# Altium PCB PVLoad.PcbDoc
Units mil, origin at the board's own origin, x right, y up, seen from the top; angles counter-clockwise.
Board outline 3405.51 x 3877.95 mil, 2 copper layers (Top Layer, Bottom Layer), stack 65.792 mil thick; 28 components, 20 nets, 107 pads, 1040 vias.
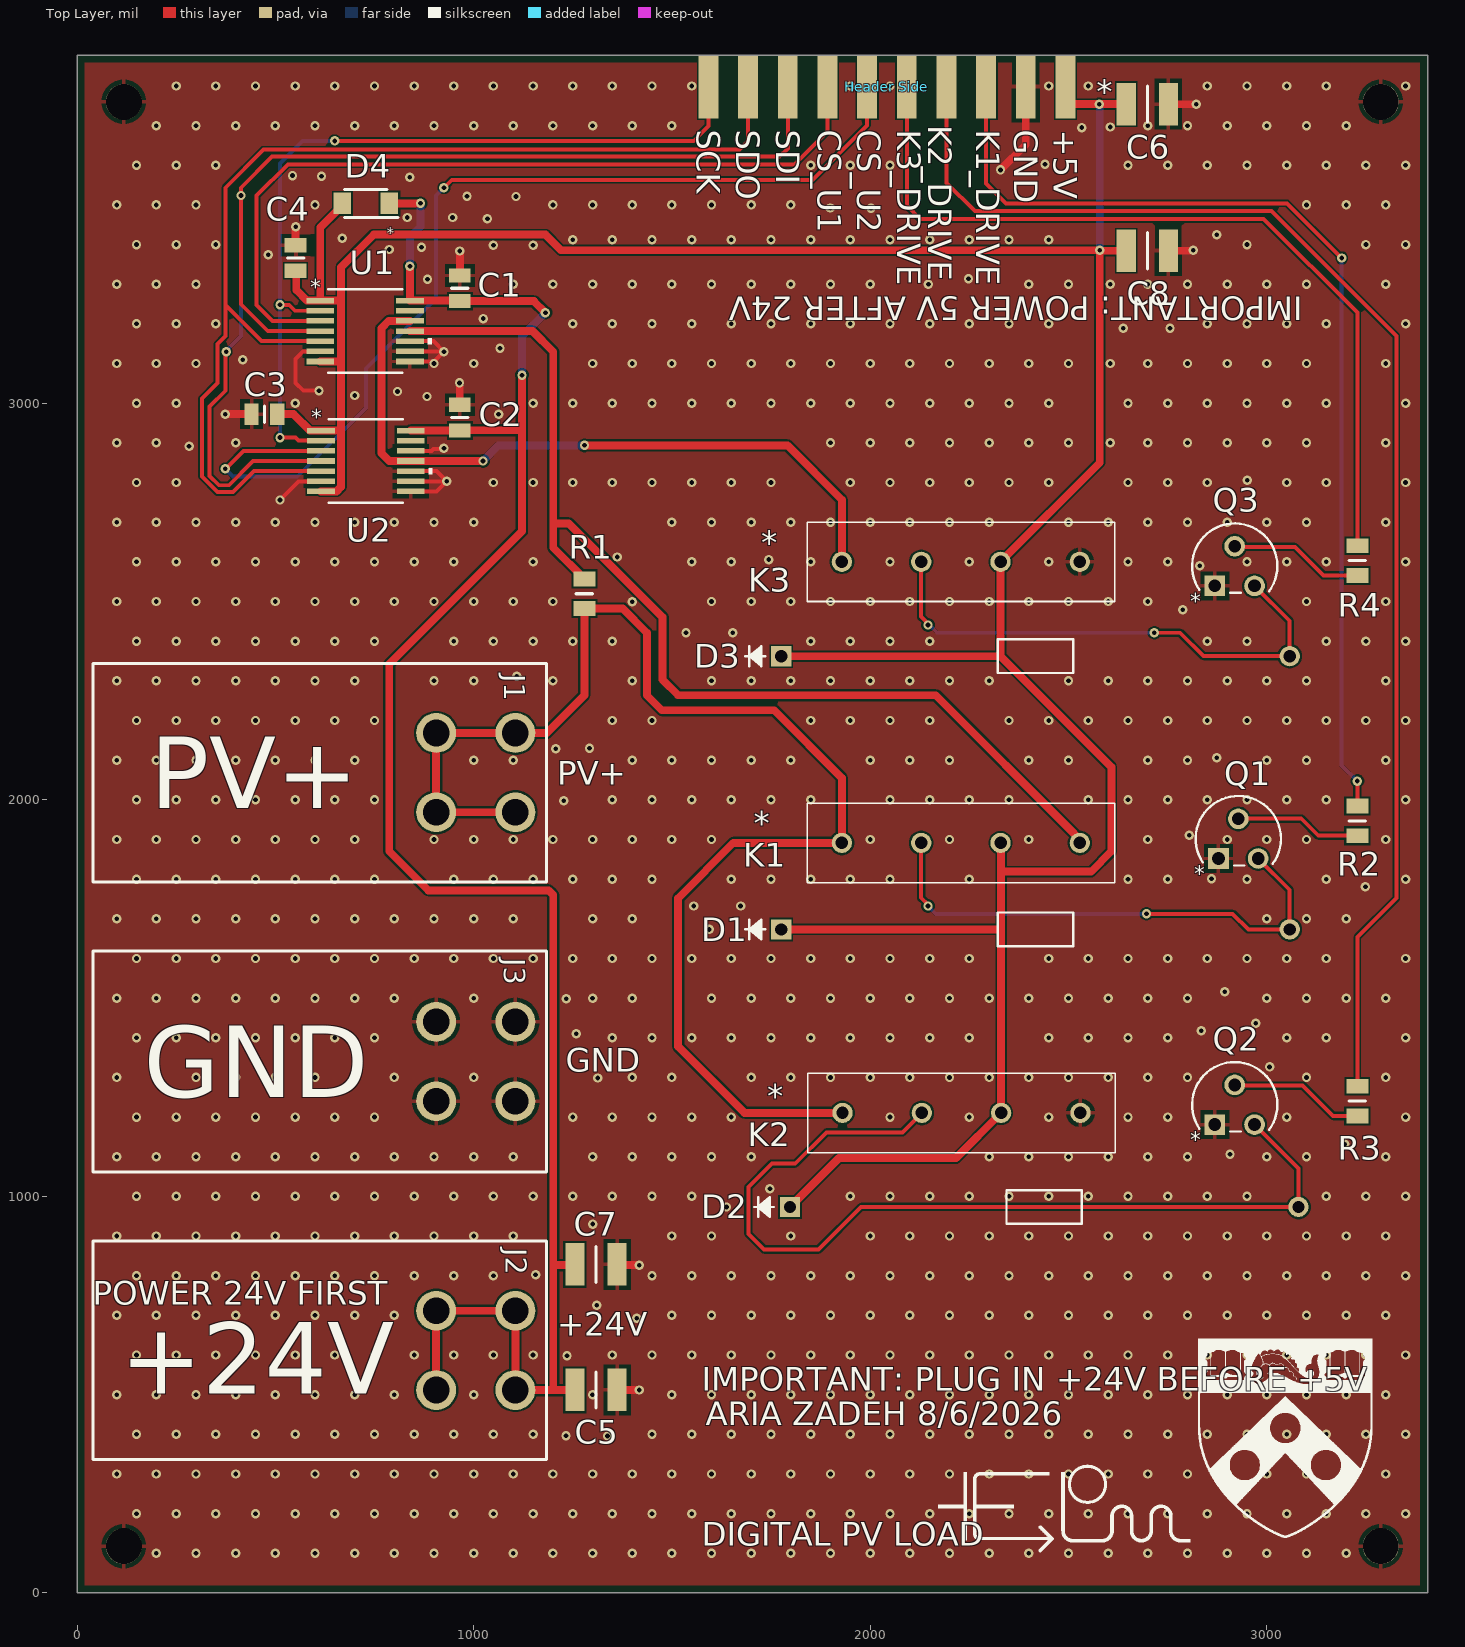
[diagram p0: Top Layer view]
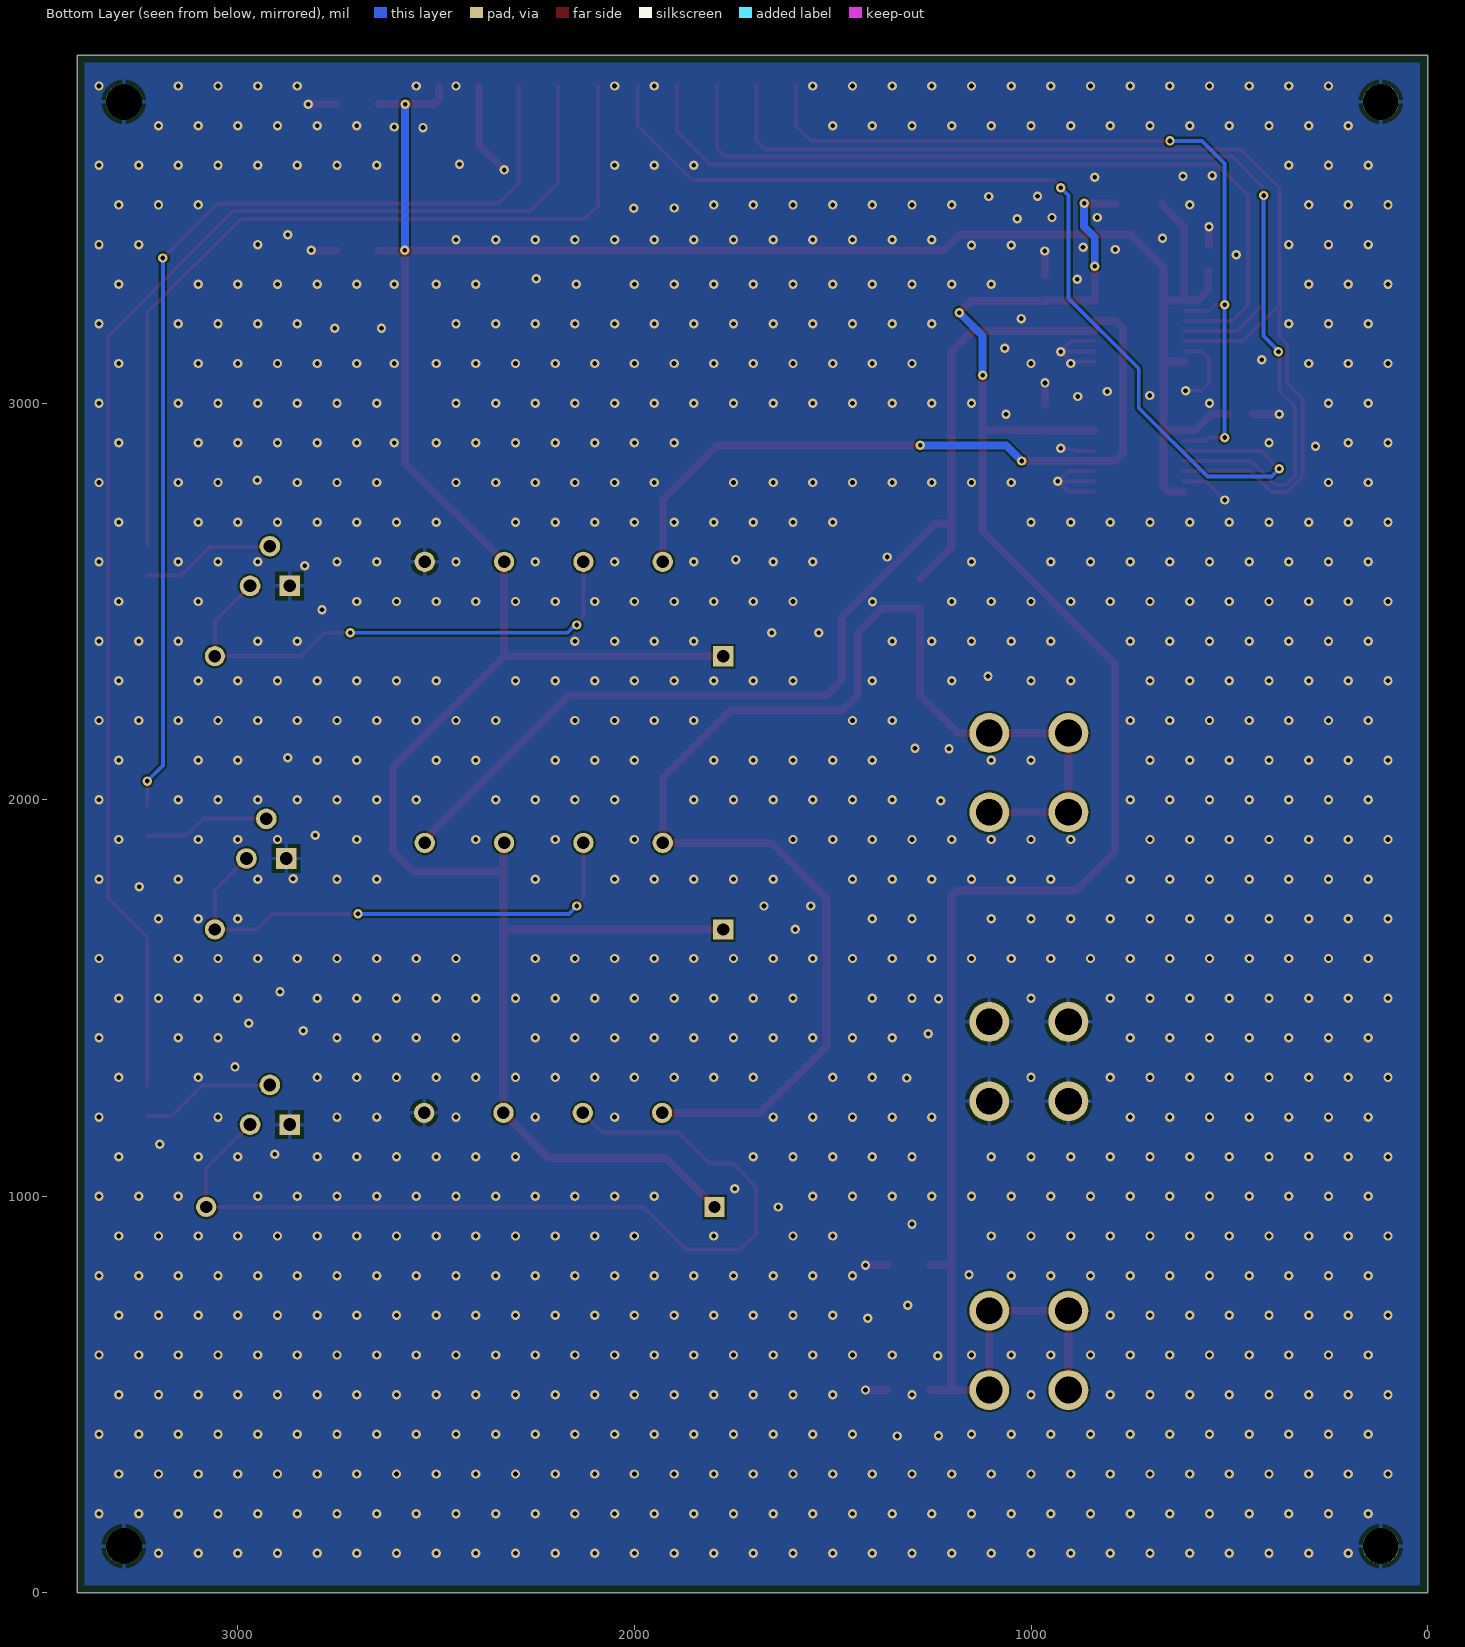
[diagram p1: Bottom Layer view, seen from below]
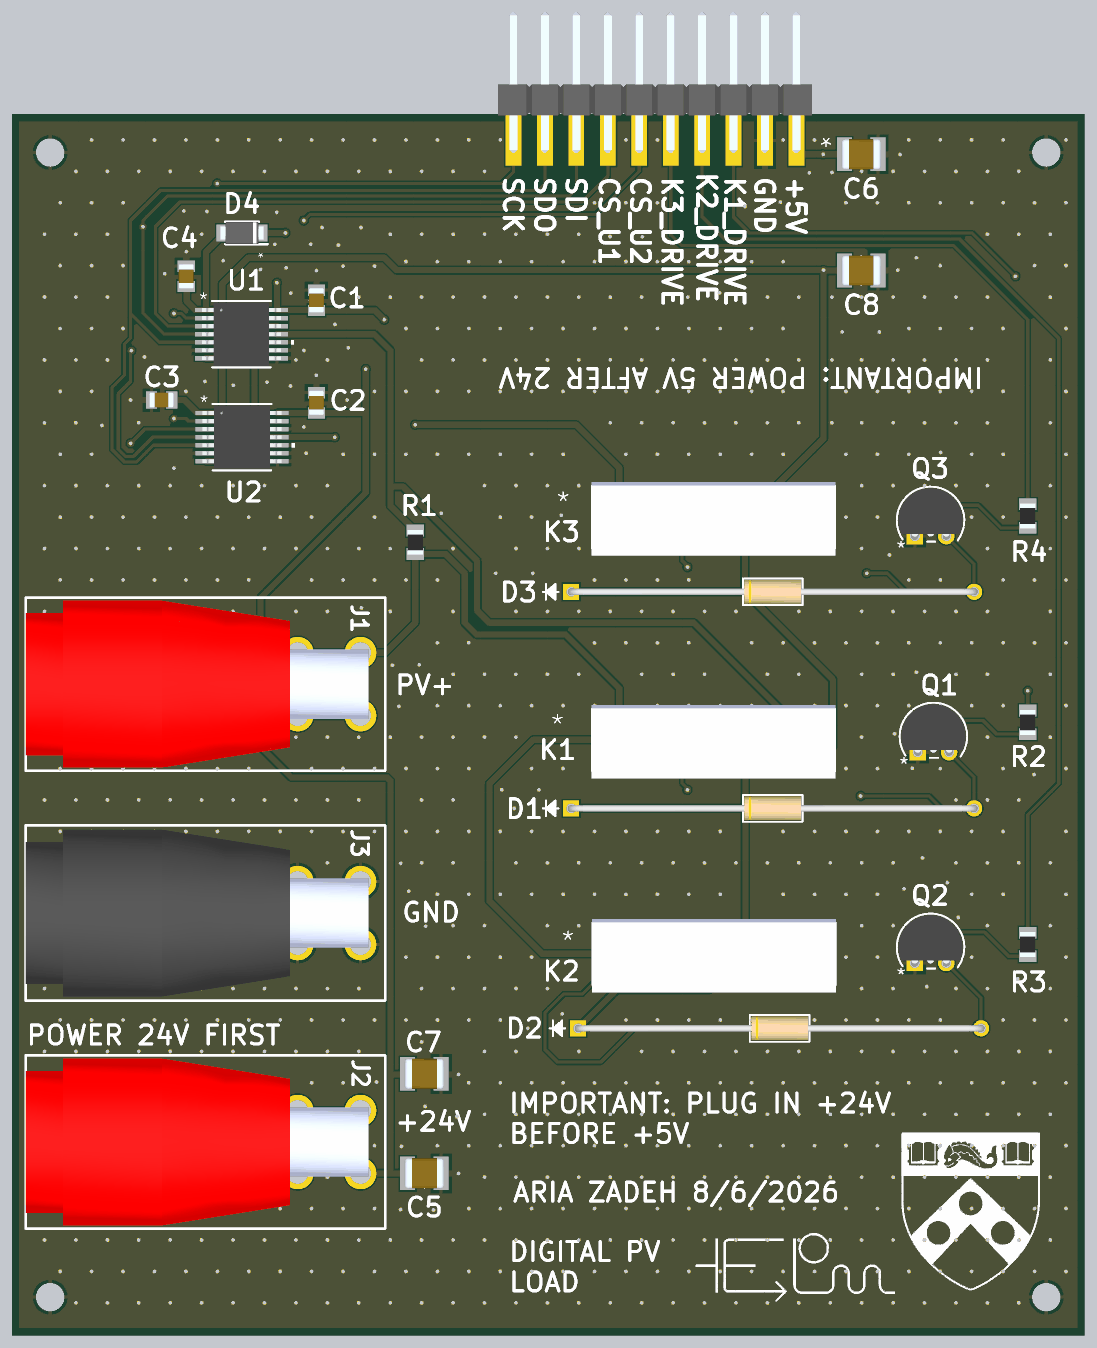
[diagram p2: 3D render of the assembled board from above, using the file's embedded part models]

## Layer stack, top to bottom
Top Solder: solder mask 0.4, Solder Resist, Dk 3.5
Top Layer: signal copper 1.4
Dielectric 1: dielectric 62.9921, FR-4, Dk 4.8
Bottom Layer: signal copper 1.4
Bottom Solder: solder mask 0.4, Solder Resist, Dk 3.5

## Board outline
0,0 3405.51,0 3405.51,3877.95 0,3877.95

## Design rules (kind name [scope] priority, off if disabled: settings)
BoardOutlineClearance [All] p1: gap=0 ignorepadtopadclearanceinfootprint=FALSE
Clearance [All] p1: gap=5 ignorepadtopadclearanceinfootprint=TRUE except(0: Arc-Text Arc-Hole Track-Text Track-Hole SMDPad-Text SMDPad-Hole THPad-Text THPad-Hole Via-Text Via-Hole Fill-Text Fill-Hole Poly-Text Poly-Hole Region-Text Region-Hole Text-Text Text-Hole)
HoleSize [All] p1: absolutevalues=TRUE maxlimit=100 minlimit=10 maxpercent=80.000 minpercent=20.000
MinimumAnnularRing [All] p1: minimumring=0
PolygonConnect [All] p1: thpad.connectstyle=Relief thpad.reliefconductorwidth=10 thpad.reliefentries=4 thpad.polygonreliefangle="90 Angle" thpad.airgapwidth=10 smdpad.connectstyle=Relief smdpad.reliefconductorwidth=10 smdpad.reliefentries=4 smdpad.polygonreliefangle="90 Angle" smdpad.airgapwidth=10 via.connectstyle=Direct via.reliefconductorwidth=10 via.reliefentries=4 via.polygonreliefangle="90 Angle" via.airgapwidth=10
RoutingVias [All] p1: holewidth=28 width=50 viastyle="Through Hole" minholewidth=10 minwidth=20 maxholewidth=100 maxwidth=200
SilkToSilkClearance [All] p1: silktosilkclearance=0
SilkToSolderMaskClearance [IsPad] p1: minsilkscreentomaskgap=0 clearancetoexposedcopper=TRUE
SolderMaskExpansion [All] p1: expansion=0 istentingtop=FALSE
SupplyNets "Schematic Supply Nets_3" [InNet('+5V')] p1: voltage=0.000
SupplyNets "Schematic Supply Nets_2" [InNet('+24V')] p2: voltage=0.000
SupplyNets "Schematic Supply Nets_1" [InNet('GND')] p3: voltage=0.000
SupplyNets "Schematic Supply Nets" [InNet('PV+')] p4: voltage=0.000
Width Width_Analog [All] p1: maxlimit=78.74 minlimit=10 preferedwidth=19.68 minimp=50.000000 maximp=50.000000 favimp=50.000000
Width Width_PowerRails [InNet('+24V') or InNet('+5V') or InNet('GND')] p2: maxlimit=78.74 minlimit=15.75 preferedwidth=19.68
Width [All] p3: maxlimit=78.74 minlimit=7.87 preferedwidth=9.84
27 further rules are at their usual default settings.

## Components (designator, comment, footprint, x,y, rotation, side; value= is the part's Value field where it differs from the comment)
C1 "0.1uF Capacitor" "CAPC2012X95N 0.1UF" 965.37,3289.8 r90 top
C2 "0.1uF Capacitor" "CAPC2012X95N 0.1UF" 965.35,2963.64 r90 top
C3 "0.1uF Capacitor" "CAPC2012X95N 0.1UF" 472.44,2972.44 r180 top
C4 "0.1uF Capacitor" "CAPC2012X95N 0.1UF" 551.18,3366.14 r90 top
C5 "10uF Capacitor" "CAPC3225X270N 10UF" 1308.68,512.03 r0 top
C6 "10uF Capacitor" "CAPC3225X270N 10UF" 2698.83,3754.37 r180 top
C7 "10uF Capacitor" "CAPC3225X270N 10UF" 1308.68,828.7 r0 top
C8 "10uF Capacitor" "CAPC3225X270N 10UF" 2698.83,3384.45 r180 top
D1 "1N4148" AXIAL_017AG_T26_ONS 1775.87,1673.23 r0 top
D2 "1N4148" AXIAL_017AG_T26_ONS 1797.82,973.41 r0 top
D3 "1N4148" AXIAL_017AG_T26_ONS 1775.87,2362.2 r0 top
D4 "1N5819HW1-7-F" SODFL3518X115N 728.35,3503.94 r180 top
"Header Side" "Sideways Header x10" "SIDEWAYS HEADER X10" 2492.3,3798.03 r180 top
J1 "CT3151-2" CALTEST_CT3151-2 1105.51,2168.5 r270 top
J2 "CT3151-2" CALTEST_CT3151-2 1105.51,711.81 r270 top
J3 "CT3151-0" CT31510 1105.51,1440.16 r270 top
K1 "HE3621A0540" HE3621A0540 1928.61,1891.35 r0 top
K2 "HE3621A0540" HE3621A0540 1930.2,1210.53 r0 top
K3 "HE3621A0540" HE3621A0540 1928.61,2600.01 r0 top
Q1 "2N3904BU" TO-92_FAS 2878.22,1851.98 r0 top
Q2 "2N3904BU" TO-92_FAS 2869.16,1181.12 r0 top
Q3 "2N3904BU" TO-92_FAS 2869.16,2539.39 r0 top
R1 "RC0805FR-07470KL" "RESC2012X60N 470K" 1279.53,2519.68 r90 top
R2 "RC0805FR-071KL" "RESC2012X60N 1K" 3228.35,1946.85 r270 top
R3 "RC0805FR-071KL" "RESC2012X60N 1K" 3228.35,1240.16 r270 top
R4 "RC0805FR-071KL" "RESC2012X60N 1K" 3228.35,2603.22 r270 top
U1 "MCP41HV51-502E/ST" TSSOP14_MC_MCH-M 726.44,3181.98 r0 top
U2 "MCP41HV51-502E/ST" TSSOP14_MC_MCH-M 728.35,2854.33 r0 top

## Footprints (in the part's own frame and the unit in brackets; to place one, negate y for a bottom-side part, rotate by r counter-clockwise, add the part's x,y. Pads: shape width x height; smd on the part's side, far side on the other; paste and mask are expansions set on the pad)
AXIAL_017AG_T26_ONS [mil]
  rect 51x51 hole 31 paste-99999 mask+0: 1(0,0)
  round 51 hole 31 paste-99999 mask+0: 2(1282,0)
  silkscreen extent -90,-42 736,42, body extent -11,-37 1292,37, height 75
CALTEST_CT3151-2 [mm]
  round 2.55 hole 1.7: 1(0,0) 2(5.08,0) 3(0,-5.08) 4(5.08,-5.08)
  silkscreen extent -4.46,-27.05 9.54,1.98, body extent -4.21,-27.06 9.29,0.64, height 19.44
"CAPC2012X95N 0.1UF" [mm]
  rect 0.91x1.39 smd: 1(-0.82,0) 2(0.82,0)
  silkscreen extent 0,-0.53 0,0.53, body extent -1,-0.63 1,0.63, height 0.95
"CAPC3225X270N 10UF" [mm]
  rect 1.22x2.72 smd: 1(-1.35,0) 2(1.35,0)
  silkscreen extent 0,-1.15 0,1.15, body extent -1.6,-1.25 1.6,1.25, height 2.7
CT31510 [mm]
  round 2.55 hole 1.7: 1(0,0) 2(0,-5.08) 3(5.08,-5.08) 4(5.08,0)
  silkscreen extent -4.54,-27.06 9.61,1.98, body extent -4.21,-27.06 9.29,0.64, height 19.53
HE3621A0540 [mm]
  round 1.3 hole 0.8: 1(0,0) 2(5.08,0) 3(10.16,0) 4(15.24,0)
  silkscreen extent -2.23,-2.54 17.47,2.54, body extent -2.23,-3.13 17.47,2.96, height 8.49
"RESC2012X60N 1K" [mm]
  rect 0.95x1.4 smd: 1(-0.95,0) 2(0.95,0)
  silkscreen extent 0,-0.53 0,0.53, body extent -1,-0.63 1,0.63, height 0.6
"RESC2012X60N 470K" [mm]
  rect 0.95x1.4 smd: 1(-0.95,0) 2(0.95,0)
  silkscreen extent 0,-0.53 0,0.53, body extent -1,-0.63 1,0.63, height 0.6
"SIDEWAYS HEADER X10" [mil]
  rect 50x160 smd paste-99999 mask+0: 1(0,0) 2(100,0) 3(200,0) 4(300,0) 5(400,0) 6(500,0) 7(600,0) 8(700,0) 9(800,0) 10(900,0)
  body extent -50,-408 950,40, height 50
SODFL3518X115N [mm]
  rect 1.12x1.37 smd: 1(-1.5,0) 2(1.5,0)
  silkscreen extent -2.06,-0.9 1.35,0.9, body extent -1.75,-0.9 1.75,0.9, height 1.15
TO-92_FAS [mil]
  rect 52x52 hole 32 paste-99999 mask+0: 1(0,0)
  round 52 hole 32 paste-99999 mask+0: 2(50,100) 3(100,0)
  silkscreen extent -57,-18 158,157, body extent -52,-11 152,152, height 297
TSSOP14_MC_MCH-M [mil]
  rect 70x14 smd paste+0 mask+0: 1(-113,76.77) 2(-113,51.18) 3(-113,25.59) 4(-113,0) 5(-113,-25.59) 6(-113,-51.18) 7(-113,-76.77) 8(113,-76.77) 9(113,-51.18) 10(113,-25.59) 11(113,0) 12(113,25.59) 13(113,51.18) 14(113,76.77)
  silkscreen extent -94,-105 168,106, body extent -126,-101 126,101, height 47

## Part data
C1 C2 C3 C4: "Capacitor", Arrow Part Number=CL21B104KBCNNNC, Manufacturer_Name=SAMSUNG, Mouser Part Number=187-CL21B104KBCNNNC, Arrow Price/Stock=https://www.arrow.com/en/products/cl21b104kbcnnnc/samsung-electro-mechanics?utm_currency=USD&region=nac, Datasheet Link=https://datasheet.datasheetarchive.com/originals/distributors/Datasheets_SAMA/86a3eaf0882763ef32124d5901f9b833.pdf, Height=0.95mm, Manufacturer_Part_Number=CL21B104KBCNNNC, Mouser Price/Stock=https://www.mouser.co.uk/ProductDetail/Samsung-Electro-Mechanics/CL21B104KBCNNNC?qs=349EhDEZ59pEfpnm5yBEmQ%3D%3D
C5 C6 C7 C8: "Capacitor", Arrow Part Number=CL32B106KBJNNNE, Manufacturer_Name=SAMSUNG, Mouser Part Number=187-CL32B106KBJNNNE, Arrow Price/Stock=https://www.arrow.com/en/products/cl32b106kbjnnne/samsung-electro-mechanics.html?utm_currency=USD&region=nac, Datasheet Link=https://datasheet.datasheetarchive.com/originals/distributors/Datasheets-DGA10/2406903.pdf, Height=2.7mm, Manufacturer_Part_Number=CL32B106KBJNNNE, Mouser Price/Stock=https://www.mouser.co.uk/ProductDetail/Samsung-Electro-Mechanics/CL32B106KBJNNNE?qs=349EhDEZ59rXK%2FOM74I5cg%3D%3D
D1 D2 D3: "No Description Available", Manufacturer_Name=onsemi, Copyright="Copyright (C) 2026 Ultra Librarian. All rights reserved.", Manufacturer_Part_Number=1N4148
D4: "Schottky Diode", Manufacturer_Name="Diodes Incorporated", Mouser Part Number=621-1N5819HW1-7-F, Arrow Part Number=1N5819HW1-7-F, Arrow Price/Stock=https://www.arrow.com/en/products/1n5819hw1-7-f/diodes-incorporated?utm_currency=USD&region=nac, Datasheet Link=https://www.diodes.com//assets/Datasheets/1N5819HW1.pdf, Height=1.15mm, Manufacturer_Part_Number=1N5819HW1-7-F, Mouser Price/Stock=https://www.mouser.co.uk/ProductDetail/Diodes-Incorporated/1N5819HW1-7-F?qs=60RJRzIpcl9ACQG7Zn63jQ%3D%3D
J1 J2: "Banana Jack Connector Standard Banana Solder Red", Package=None, Check_prices=https://www.snapeda.com/parts/CT3151-2/Cal+Test+Electronics/view-part/?ref=eda, MF="Cal Test", MP=CT3151-2, SnapEDA_Link=https://www.snapeda.com/parts/CT3151-2/Cal+Test+Electronics/view-part/?ref=snap
J3: "4mm Safety Jack Horizontal PCB Mount", Manufacturer_Name="Cal Test", Mouser Part Number=510-CT3151-0, Datasheet Link=https://componentsearchengine.com/Datasheets/1/CT3151-0.pdf, Geometry.Height=13.5mm, Manufacturer_Part_Number=CT3151-0, Mouser Price/Stock=https://www.mouser.co.uk/ProductDetail/Cal-Test/CT3151-0?qs=vgjKjNJexTi7zzqDU3Xrcg%3D%3D
K1 K2 K3: "Reed Relay 5VDC 500Ohm 0.5A SPST-NO(20.2x6.05x7.87)mm THT Dry", Manufacturer_Name=LITTELFUSE, Mouser Part Number=934-HE3621A0540, Arrow Part Number=HE3621A0540, Arrow Price/Stock=https://www.arrow.com/en/products/he3621a0540/littelfuse?utm_currency=USD&region=nac, Datasheet Link=https://m.littelfuse.com/~/media/electronics/datasheets/reed_relays/littelfuse_reed_relays_he3600_datasheet.pdf.pdf, Geometry.Height=7.87mm, Manufacturer_Part_Number=HE3621A0540, Mouser Price/Stock=https://www.mouser.co.uk/ProductDetail/Littelfuse/HE3621A0540?qs=X8LBAgEWIKIUBLwFF6DU2A%3D%3D
Q1 Q2 Q3: "No Description Available", Manufacturer_Name="onsemi / Fairchild Semiconductor", Copyright="Copyright (C) 2026 Ultra Librarian. All rights reserved.", Manufacturer_Part_Number=2N3904BU, RefDes=RefDes, Type=Type
R1: "Resistor", Manufacturer_Name="Yageo Group", Mouser Part Number=603-RC0805FR-07470KL, Arrow Part Number=RC0805FR-07470KL, Arrow Price/Stock=https://www.arrow.com/en/products/rc0805fr-07470kl/yageo.html?utm_currency=USD&region=nac, Datasheet Link=http://www.yageo.com/documents/recent/PYu-RC_Group_51_RoHS_L_10.pdf, Height=0.6mm, Manufacturer_Part_Number=RC0805FR-07470KL, Mouser Price/Stock=https://www.mouser.com/Search/ProductDetail.aspx?qs=SufOd%252bAGZfh3Zo2uEHI0rQ%3d%3d
R2 R3 R4: "Resistor", Manufacturer_Name=TDK, Datasheet Link=https://www.yageo.com/upload/media/product/productsearch/datasheet/rchip/PYu-RC_Group_51_RoHS_L_11.pdf, Height=0.6mm, Manufacturer_Part_Number=RC0805FR-071KL
U1 U2: library part MCP41HV51-502EST, "No Description Available", Manufacturer_Name=Microchip, Copyright="Copyright (C) 2026 Ultra Librarian. All rights reserved.", Manufacturer_Part_Number=MCP41HV51-502E/ST, RefDes=RefDes, Type=Type

## Free pads (board coordinates)
  round 90.55 hole 90.55 unplated: 0(118.11,3759.84) 1(3287.4,3759.84) 2(118.11,118.11) 3(3287.4,118.11)

## Via types
v1: diameter 23.62, hole 11.81, Top Layer to Bottom Layer, tented both sides, 1040 vias

## Nets (pads, with @x,y where several pads share a name; then routed paths per layer and width w, separated by ;. In a path a pad name is that pad's centre, name@x,y a point inside that pad or via, vN(x,y) a via of type N, cw(c..) or ccw(c..) an arc to the next point about the centre after c; other vN are vias at no path point)
+5V: "Header Side.1" C3.1 C4.1 C6.2 C8.2 D1.1 D2.1 D3.1 D4.2 K1.3 K2.3 K3.3 U1.1 U1.7 U2.1 U2.7 | length 8324.4
  Top Layer w19.68: C3.1 546.01,2972.44 587.35,2931.1 U2.1 665.85,2931.1 ; C4.1 552.87,3332.16 552.87,3285.71 579.83,3258.75 U1.1 ; U1.7 665.85,3105.2 ; U2.7 654.32,2777.56 665.85,2789.09 665.85,2931.1 ; D4.2 669.29,3499.02 613.44,3443.16 U1.1 ; D1.1 2330.2,1673.23 ; D3.1 2328.61,2362.2 ; D2.1 1921.19,1096.79 2216.46,1096.79 K2.3 2330.2,1673.23 ; K1.3 2330.2,1889.76 2330.2,1818.88 ; 2492.3,3798.03 2492.3,3767.13 2507.45,3751.98 2507.45,3754.14 v1(2577.5,3754.14) 2645.44,3754.14 C6.2 ; v1(2578.74,3385.83) 2578.74,3384.54 2578.74,2850.14 K3.3 2328.61,2362.2 ; v1@2578.74,3385.9 1220.4,3385.9 1181.1,3425.2 748.03,3425.2 665.85,3343.02 665.85,3258.75 ; v1@2580.03,3384.54 2580.56,3385.07 2581.18,3384.45 C8.2 ; U1.1 665.85,3258.75 ; 665.85,2931.1 665.85,3105.2 ; 665.85,3105.2 665.85,3258.75 ; 2328.61,2362.2 2608.25,2082.56 2608.25,1870.09 2557.05,1818.88 2330.2,1818.88 ; 2330.2,1673.23 2330.2,1818.88
  Bottom Layer w19.68: v1(2578.74,3385.83) 2578.74,3751.83 2578.26,3752.32 2578.26,3752.42 v1@2578.74,3752.9
+24V: C1.1 C2.1 C5.1 C7.1 D4.1 J2.1 J2.2 J2.3 J2.4 U1.14 U2.14 | length 4998.6
  Top Layer w19.68: D4.1 v1(866.14,3503.94) ; U1.14@839.42,3261.59 v1(839.42,3345.39) ; U1.14 C1.1@964.14,3258.75 ; U2.14@841.35,2931.36 C2.1 ; J2.4 J2.3 J2.1 J2.2 1200.79,511.81 ; C1.1 1151.94,3257.51 v1(1181.1,3228.35) ; C2.1@965.61,2931.61 1122.05,2931.61 ; v1(1122.05,3070.87) 1122.05,2931.61 ; C5.1@1255.53,511.81 1200.79,511.81 ; C7.1@1255.53,826.77 1201.22,826.77 1200.79,826.34 ; 1122.05,2931.61 1122.05,2677.17 787.4,2342.52 787.4,1870.08 885.83,1771.65 1189.26,1771.65 1195.02,1765.89 1200.79,1760.12 1200.79,826.34 ; 1200.79,511.81 1200.79,826.34
  Bottom Layer w19.68: v1(839.42,3345.39) 839.42,3418.16 866.14,3444.88 v1(866.14,3503.94) ; v1(1122.05,3070.87) 1122.05,3169.29 v1(1181.1,3228.35)
CHAIN: K3.1 U1.12 U2.11 | length 1793
  Top Layer w19.68: U1.12 786.31,3207.57 767.72,3188.98 767.72,2874.02 787.4,2854.33 v1(1023.62,2854.33) ; v1(1279.53,2893.7) 1791.34,2893.7 1928.61,2756.43 K3.1
  Bottom Layer w19.68: v1(1023.62,2854.33) 1062.99,2893.7 v1(1279.53,2893.7)
CS_U1: "Header Side.7" U1.3 | length 2072.4
  Top Layer w10: U1.3 493.22,3207.57 452.76,3248.03 452.76,3523.62 531.5,3602.36 1809.5,3602.36 1892.3,3685.16 1892.3,3798.03
CS_U2: "Header Side.6" U2.3 | length 2560.7
  Top Layer w10: v1(374.02,2834.65) 419.29,2879.92 U2.3 ; v1(925.2,3543.31) 944.88,3562.99 1854.5,3562.99 1992.3,3700.79 1992.3,3798.03
  Bottom Layer w10: v1(374.02,2834.65) 393.7,2814.96 555.3,2814.96 728.35,2988 728.35,3087.07 905.51,3264.23 905.51,3523.62 v1(925.2,3543.31)
GND: "Header Side.2" C1.2 C2.2 C3.2 C4.2 C5.2 C6.1 C7.2 C8.1 J3.1 J3.2 J3.3 J3.4 K2.4 K3.4 pad.0 pad.1 pad.2 pad.3 Q1.1 Q2.1 Q3.1 U1.6 U1.8 U1.9 U1.10 U2.6 U2.8 U2.9 U2.10 U2.12 | length 1690.2
  Top Layer w10: v1(511.81,2755.91) 559.06,2803.15 U2.6 ; v1(610.24,3031.5) 570.87,3031.5 551.18,3051.18 551.18,3111.78 570.2,3130.8 U1.6 ; U1.8 900.48,3105.2 v1(925.2,3129.92) v1@924.76,3130.36 ; U1.9 839.87,3130.36 v1@924.76,3130.36 ; U1.10 898.73,3156.39 v1@924.76,3130.36 ; U2.8 906.41,2777.56 v1@932.01,2803.15 ; U2.9 v1@932.01,2803.15 ; U2.10 906.02,2828.74 v1@931.41,2803.35 ; U2.12 893.39,2879.92 898.39,2884.92 923.39,2884.92 v1(925.2,2886.73) ; v1(932.2,2803.35) v1@932.01,2803.15
  Top Layer w19.68: v1(374.02,2972.44) C3.2 ; C4.2 v1(551.18,3444.88) ; v1(964.57,3051.18) 964.96,3050.79 964.96,2996.32 C2.2 ; C1.2 v1(965.37,3383.96) ; C5.2@1361.82,511.81 v1(1417.32,511.81) ; C7.2@1361.82,826.77 v1(1417.32,826.77) ; v1(2328.44,3588.28) 2392.3,3652.14 2392.3,3798.03 ; C8.1 2812.52,3384.45 2813.9,3385.83 v1(2814.96,3385.83) ; C6.1 2752.58,3753.76 v1(2822.35,3753.76)
  other v1: 200,100 300,100 400,100 500,100 600,100 700,100 800,100 900,100 1000,100 1100,100 1200,100 1300,100 1400,100 1500,100 1600,100 1700,100 1800,100 1900,100 2000,100 2100,100 2200,100 2300,100 2400,100 2500,100 2600,100 2700,100 2800,100 2900,100 3000,100 3100,100 3200,100 150,200 250,200 350,200 450,200 550,200 650,200 750,200 850,200 950,200 1050,200 1150,200 1250,200 1350,200 1450,200 1550,200 1650,200 1750,200 1850,200 1950,200 2050,200 2150,200 2250,200 2350,200 2450,200 2550,200 2650,200 2750,200 2850,200 2950,200 3050,200 3150,200 3250,200 3350,200 100,300 200,300 300,300 400,300 500,300 600,300 700,300 800,300 900,300 1000,300 1100,300 1200,300 1300,300 1400,300 1500,300 1600,300 1700,300 1800,300 1900,300 2000,300 2100,300 2200,300 2300,300 2400,300 2500,300 2600,300 2700,300 2800,300 2900,300 3000,300 3100,300 3200,300 3300,300 1337.56,395.74 1233.15,396.74 150,400 250,400 350,400 450,400 550,400 650,400 750,400 850,400 950,400 1050,400 1150,400 1450,400 1550,400 1650,400 1750,400 1850,400 1950,400 2050,400 2150,400 2250,400 2350,400 2450,400 2550,400 2650,400 2750,400 2850,400 2950,400 3050,400 3150,400 3250,400 3350,400 100,500 200,500 300,500 400,500 500,500 600,500 700,500 800,500 1000,500 1300,500 1500,500 1600,500 1700,500 1800,500 1900,500 2000,500 2100,500 2200,500 2300,500 2400,500 2500,500 2600,500 2700,500 2800,500 2900,500 3000,500 3100,500 3200,500 3300,500 1235.49,597.89 150,600 250,600 350,600 450,600 550,600 650,600 750,600 850,600 950,600 1050,600 1150,600 1350,600 1450,600 1550,600 1650,600 1750,600 1850,600 1950,600 2050,600 2150,600 2250,600 2350,600 2450,600 2550,600 2650,600 2750,600 2850,600 2950,600 3050,600 3150,600 3250,600 3350,600 1411.62,692.59 100,700 200,700 300,700 400,700 500,700 600,700 700,700 800,700 1500,700 1600,700 1700,700 1800,700 1900,700 2000,700 2100,700 2200,700 2300,700 2400,700 2500,700 2600,700 2700,700 2800,700 2900,700 3000,700 3100,700 3200,700 3300,700 1310.81,725.4 150,800 250,800 350,800 450,800 550,800 650,800 750,800 850,800 950,800 1050,800 1450,800 1550,800 1650,800 1750,800 1850,800 1950,800 2050,800 2150,800 2250,800 2350,800 2450,800 2550,800 2650,800 2750,800 2850,800 2950,800 3050,800 3150,800 3250,800 3350,800 1156.26,802.44 100,900 200,900 300,900 400,900 500,900 600,900 700,900 800,900 900,900 1000,900 1100,900 1500,900 1600,900 1800,900 2000,900 2100,900 2200,900 2300,900 2400,900 2500,900 2600,900 2700,900 2800,900 2900,900 3000,900 3100,900 3200,900 3300,900 1300.05,930.21 1637.72,973.44 150,1000 250,1000 350,1000 450,1000 550,1000 650,1000 750,1000 850,1000 950,1000 1050,1000 1150,1000 1250,1000 1350,1000 1450,1000 1550,1000 1950,1000 2050,1000 2150,1000 2250,1000 2350,1000 2450,1000 2550,1000 2650,1000 2750,1000 2850,1000 2950,1000 3150,1000 3250,1000 3350,1000 1747.15,1019.13 100,1100 200,1100 300,1100 400,1100 500,1100 600,1100 700,1100 800,1100 900,1100 1000,1100 1100,1100 1300,1100 1400,1100 1500,1100 1600,1100 1700,1100 2300,1100 2400,1100 2500,1100 2600,1100 2700,1100 2800,1100 3000,1100 3100,1100 3300,1100 2907.14,1106.02 3196.6,1131.13 150,1200 250,1200 350,1200 450,1200 550,1200 650,1200 750,1200 1250,1200 1350,1200 1450,1200 1550,1200 1650,1200 2050,1200 2250,1200 2450,1200 2650,1200 2750,1200 3050,1200 3350,1200 1312.95,1298.44 100,1300 200,1300 300,1300 400,1300 500,1300 600,1300 700,1300 800,1300 1000,1300 1400,1300 1500,1300 1700,1300 1800,1300 1900,1300 2000,1300 2100,1300 2200,1300 2300,1300 2400,1300 2500,1300 2600,1300 2700,1300 2800,1300 3100,1300 3300,1300 3007.04,1326.49 150,1400 250,1400 350,1400 450,1400 550,1400 650,1400 750,1400 1350,1400 1450,1400 1550,1400 1650,1400 1750,1400 1850,1400 1950,1400 2050,1400 2150,1400 2250,1400 2450,1400 2550,1400 2650,1400 2750,1400 3050,1400 3150,1400 3350,1400 1259.17,1409.96 2834.65,1417.32 2972.44,1437.01 1233.33,1498.58 100,1500 200,1500 300,1500 400,1500 500,1500 600,1500 700,1500 800,1500 1000,1500 1300,1500 1400,1500 1600,1500 1700,1500 1800,1500 1900,1500 2000,1500 2100,1500 2200,1500 2300,1500 2400,1500 2500,1500 2600,1500 2700,1500 2800,1500 3000,1500 3100,1500 3200,1500 3300,1500 2893.7,1515.75 150,1600 250,1600 350,1600 450,1600 550,1600 650,1600 750,1600 850,1600 950,1600 1050,1600 1150,1600 1250,1600 1350,1600 1450,1600 1550,1600 1650,1600 1750,1600 1850,1600 1950,1600 2050,1600 2150,1600 2250,1600 2450,1600 2550,1600 2650,1600 2750,1600 2850,1600 2950,1600 3050,1600 3150,1600 3350,1600 1594.49,1673.23 100,1700 200,1700 300,1700 400,1700 500,1700 600,1700 700,1700 800,1700 900,1700 1000,1700 1100,1700 1300,1700 1400,1700 3000,1700 3100,1700 3200,1700 1555.12,1732.28 1673.23,1732.28 3248.71,1780.96 150,1800 250,1800 350,1800 450,1800 550,1800 650,1800 750,1800 950,1800 1050,1800 1150,1800 1250,1800 1350,1800 1450,1800 1650,1800 1750,1800 1850,1800 1950,1800 2050,1800 2250,1800 2650,1800 2750,1800 2950,1800 3150,1800 3350,1800 2860.67,1801.22 100,1900 200,1900 300,1900 400,1900 500,1900 600,1900 700,1900 900,1900 1000,1900 1100,1900 1200,1900 1300,1900 1400,1900 1500,1900 1600,1900 2000,1900 2200,1900 2400,1900 2700,1900 2900,1900 3000,1900 3100,1900 3300,1900 2804.83,1910.46 1227.61,1998.01 150,2000 250,2000 350,2000 450,2000 550,2000 650,2000 750,2000 1350,2000 1450,2000 1550,2000 1650,2000 1750,2000 1850,2000 2050,2000 2150,2000 2250,2000 2350,2000 2550,2000 2650,2000 2750,2000 2850,2000 2950,2000 3050,2000 3150,2000 3350,2000 100,2100 200,2100 300,2100 400,2100 500,2100 600,2100 700,2100 1000,2100 1100,2100 1400,2100 1500,2100 1600,2100 1700,2100 1800,2100 2000,2100 2100,2100 2200,2100 2400,2100 2500,2100 2700,2100 2800,2100 3000,2100 3100,2100 3300,2100 2874.02,2106.3 1206.9,2128.79 1292.39,2130.07 150,2200 250,2200 350,2200 450,2200 550,2200 650,2200 750,2200 1350,2200 1450,2200 1850,2200 1950,2200 2050,2200 2150,2200 2350,2200 2450,2200 2550,2200 2650,2200 2750,2200 2850,2200 2950,2200 3050,2200 3150,2200 3250,2200 3350,2200 100,2300 200,2300 300,2300 400,2300 500,2300 600,2300 700,2300 900,2300 1000,2300 1200,2300 1400,2300 1600,2300 1700,2300 1800,2300 1900,2300 2000,2300 2100,2300 2200,2300 2300,2300 2500,2300 2600,2300 2700,2300 2800,2300 2900,2300 3000,2300 3100,2300 3300,2300 1108.44,2311.19 150,2400 250,2400 350,2400 450,2400 550,2400 650,2400 750,2400 950,2400 1050,2400 1150,2400 1250,2400 1350,2400 1850,2400 1950,2400 2050,2400 2150,2400 2850,2400 2950,2400 3150,2400 3250,2400 3350,2400 1535.43,2421.26 1653.54,2421.26 2787.84,2479.44 100,2500 200,2500 300,2500 400,2500 500,2500 600,2500 700,2500 800,2500 900,2500 1000,2500 1100,2500 1200,2500 1399.66,2499.66 1600,2500 1700,2500 1800,2500 1900,2500 2000,2500 2100,2500 2200,2500 2300,2500 2400,2500 2500,2500 2600,2500 2700,2500 3100,2500 3300,2500 2830.94,2589.96 150,2600 250,2600 350,2600 450,2600 550,2600 650,2600 750,2600 850,2600 950,2600 1150,2600 1550,2600 1650,2600 1850,2600 2050,2600 2250,2600 2450,2600 2650,2600 2750,2600 2950,2600 3050,2600 3150,2600 3350,2600 1744.24,2605.75 1362.35,2612.35 100,2700 200,2700 300,2700 400,2700 500,2700 600,2700 700,2700 800,2700 900,2700 1000,2700 1500,2700 1600,2700 1700,2700 1800,2700 1900,2700 2000,2700 2100,2700 2200,2700 2300,2700 2500,2700 2600,2700 2700,2700 2800,2700 2900,2700 3000,2700 3100,2700 3300,2700 150,2800 250,2800 1050,2800 1150,2800 1250,2800 1350,2800 1450,2800 1550,2800 1650,2800 1750,2800 1950,2800 2050,2800 2150,2800 2250,2800 2350,2800 2450,2800 2650,2800 2750,2800 2850,2800 3050,2800 3150,2800 3350,2800 2950.85,2805.92 282.6,2891.53 100,2900 200,2900 400,2900 1900,2900 2000,2900 2100,2900 2200,2900 2300,2900 2400,2900 2500,2900 2605.39,2900 2700,2900 2800,2900 2900,2900 3000,2900 3100,2900 3300,2900 1062.99,2972.44 150,3000 250,3000 550,3000 1150,3000 1250,3000 1350,3000 1450,3000 1550,3000 1650,3000 1750,3000 1850,3000 1950,3000 2050,3000 2150,3000 2250,3000 2350,3000 2450,3000 2650,3000 2750,3000 2850,3000 2950,3000 3050,3000 3150,3000 3350,3000 882.44,3016.98 700.7,3019.38 808.01,3029.43 100,3100 200,3100 300,3100 900,3100 1000,3100 1300,3100 1400,3100 1500,3100 1600,3100 1700,3100 1800,3100 1900,3100 2000,3100 2100,3100 2200,3100 2300,3100 2400,3100 2500,3100 2605.39,3100 2700,3100 2800,3100 2900,3100 3000,3100 3100,3100 3300,3100 417.84,3109.34 1066.47,3138.29 2637.8,3188.98 2755.91,3188.98 150,3200 250,3200 350,3200 1250,3200 1350,3200 1450,3200 1550,3200 1650,3200 1750,3200 1850,3200 1950,3200 2050,3200 2150,3200 2250,3200 2350,3200 2450,3200 2850,3200 2950,3200 3050,3200 3150,3200 3350,3200 1024.3,3213.4 100,3300 200,3300 300,3300 1100,3300 1200,3300 1300,3300 1400,3300 1500,3300 1600,3300 1700,3300 1800,3300 1900,3300 2000,3300 2146.84,3300.06 2400,3300 2500,3300 2605.39,3300 2700,3300 2800,3300 2900,3300 3000,3300 3100,3300 3300,3300 883.7,3312.79 2247.85,3313.56 482.38,3374.3 787.28,3387.75 868.69,3393 1050,3398.54 1150,3398.54 150,3400 250,3400 350,3400 2950,3400 3250,3400 3350,3400 1250,3412.55 1350,3412.55 1450,3412.55 1550,3412.55 1650,3412.55 1750,3412.55 1850,3412.55 1950,3412.55 2050,3412.55 2150,3412.55 2250,3412.55 2350,3412.55 2450,3412.55 668.53,3415.78 2874.02,3425.2 1034.86,3465.35 832.95,3468.13 947.01,3468.29 1899.36,3492.17 2001.99,3491.7 100,3500 200,3500 300,3500 600,3500 1200,3500 1300,3500 1400,3500 1500,3500 1600,3500 1700,3500 1800,3500 3100,3500 3200,3500 3300,3500 983.5,3521.5 1106.76,3521.12 838.89,3569.55 616.59,3572.19 543.4,3574.02 150,3600 250,3600 350,3600 1850,3600 1950,3600 2050,3600 2650,3600 2750,3600 2850,3600 2950,3600 3050,3600 3150,3600 3250,3600 3350,3600 2440.94,3602.36 2533.11,3695.03 2605.39,3696.58 200,3700 300,3700 400,3700 500,3700 600,3700 700,3700 800,3700 900,3700 1000,3700 1100,3700 1200,3700 1300,3700 1400,3700 1500,3700 2700,3700 2800,3700 2900,3700 3000,3700 3100,3700 3200,3700 250,3800 350,3800 450,3800 550,3800 650,3800 750,3800 850,3800 950,3800 1050,3800 1150,3800 1250,3800 1350,3800 1450,3800 1550,3800 1950,3800 2050,3800 2450,3800 2550,3800 2850,3800 2950,3800 3050,3800 3150,3800 3350,3800
K1_DRIVE: "Header Side.3" R2.1 | length 2616.6
  Top Layer w10: 2292.3,3798.03 2292.3,3554.16 2342.52,3503.94 3051.18,3503.94 v1(3188.98,3366.14) ; R2.1 v1(3228.35,2047.24)
  Bottom Layer w10: v1(3188.98,3366.14) 3188.98,2086.61 v1(3228.35,2047.24)
K2_DRIVE: "Header Side.4" R3.1 | length 3469.3
  Top Layer w10: 2192.3,3798.03 2192.3,3555.74 2263.78,3484.25 3011.81,3484.25 3326.77,3169.29 3326.77,1751.97 3228.35,1653.54 R3.1
K3_DRIVE: "Header Side.5" R4.1 | length 2136.5
  Top Layer w10: 2092.3,3497.08 2092.3,3798.03 ; 2092.3,3498.26 2125.98,3464.57 2992.13,3464.57 3228.35,3228.35 R4.1
MID: K1.4 R1.2 U1.11 | length 2747.5
  Top Layer w19.68: U1.11 1148.73,3181.98 1200.79,3129.92 1200.79,2696.85 ; R1.2 1200.79,2635.83 1200.79,2696.85 ; K1.4 2528.61,1899.88 2513.91,1914.58 2513.91,1915.23 2165.35,2263.78 1515.75,2263.78 1476.38,2303.15 1476.38,2460.63 1240.16,2696.85 1200.79,2696.85
NetD1_2: D1.2 K1.2 Q1.3 | length 1314.5
  Top Layer w10: K1.2 2128.61,1753.03 2145.67,1735.97 v1(2145.67,1732.28) ; v1(2696.85,1712.6) 2914.14,1712.6 2953.51,1673.23 D1.2 3057.87,1772.33 Q1.3
  Bottom Layer w10: v1(2145.67,1732.28) 2165.35,1712.6 v1(2696.85,1712.6)
NetD2_2: D2.2 K2.2 Q2.3 | length 2334
  Top Layer w10: K2.2 2081.09,1161.42 1889.76,1161.42 1811.02,1082.68 1751.97,1082.68 1692.91,1023.62 1692.91,905.51 1732.28,866.14 1870.08,866.14 1977.35,973.41 D2.2 3079.82,1070.46 Q2.3
NetD3_2: D3.2 K3.2 Q3.3 | length 1324.9
  Top Layer w10: K3.2 2128.61,2461.69 2145.67,2444.63 v1(2145.67,2440.94) ; v1(2716.54,2421.26) 2781.56,2421.26 2840.62,2362.2 D3.2 3057.87,2450.68 Q3.3
  Bottom Layer w10: v1(2145.67,2440.94) 2149.36,2440.94 2169.04,2421.26 v1(2716.54,2421.26)
NetQ1_2: Q1.2 R2.2 | length 318.2
  Top Layer w10: Q1.2 2928.72,1952.49 3086.88,1952.49 3129.92,1909.45 R2.2
NetQ2_2: Q2.2 R3.2 | length 341.6
  Top Layer w10: Q2.2 2920.75,1279.53 3090.55,1279.53 3167.32,1202.76 R3.2
NetQ3_2: Q3.2 R4.2 | length 339.7
  Top Layer w10: Q3.2 2920.75,2637.8 3070.87,2637.8 3142.84,2565.82 R4.2
PV+: J1.1 J1.2 J1.3 J1.4 K1.1 K2.1 R1.1 | length 3442.4
  Top Layer w19.68: J1.2 J1.4 J1.3 J1.1 1184.25,2168.5 1279.53,2263.78 R1.1 1375.98,2482.28 1437.01,2421.26 1437.01,2263.78 1474.79,2226 1757.74,2226 1928.61,2055.13 K1.1 1655.13,1891.35 1515.75,1751.97 1515.75,1377.95 1683.17,1210.53 K2.1
SCK: "Header Side.10" U1.2 U2.2 | length 2125.6
  Top Layer w10: v1(511.81,2913.39) 551.18,2913.39 559.06,2905.51 U2.2 ; v1(511.81,3248.03) 535.18,3248.03 550.06,3233.16 U1.2 ; v1(649.61,3661.42) 1555.12,3661.42 1592.3,3698.59 1592.3,3799.21
  Bottom Layer w10: v1(511.81,2913.39) 511.81,3604.28 568.95,3661.42 v1(649.61,3661.42)
SDI: "Header Side.8" U1.4 U2.4 | length 3153.8
  Top Layer w10: v1(376.14,3129.92) 374.02,3127.8 374.02,3031.5 334.65,2992.13 334.65,2816.49 357.98,2793.15 383.05,2793.15 444.23,2854.33 U2.4 ; U1.4 480.97,3181.98 413.39,3249.56 413.39,3543.31 492.13,3622.05 1771.65,3622.05 1792.3,3642.69 1792.3,3799.21
  Bottom Layer w10: v1(376.14,3129.92) 376.14,3132.05 413.39,3169.29 v1(413.39,3523.62)
SDO: "Header Side.9" U1.5 U2.5 | length 2873.1
  Top Layer w10: U1.5 465.66,3156.39 374.02,3248.03 ; U2.5 446.85,2828.74 393.7,2775.59 354.33,2775.59 314.96,2814.96 314.96,3011.81 354.33,3051.18 354.33,3149.61 374.02,3169.29 374.02,3248.03 ; 1692.3,3798.03 1692.3,3660.8 1671.1,3639.61 470.32,3639.61 374.02,3543.31 374.02,3248.03
pads on no net: U1.13 U2.13

## Polygon pours and split planes (outlines as drawn)
GND on Top Layer "GND_L01_P002" (solid, remove dead copper, pour order 2): 19.68,3858.27 3385.83,3858.27 3385.83,19.68 19.68,19.68
GND on Bottom Layer "GND_L02_P001" (solid, remove dead copper, pour order 1): 19.68,3858.27 3385.83,3858.27 3385.83,19.68 19.68,19.68

## Silkscreen, mask and mechanical layers (free items; w line width, h text height)
Top Overlay:
  drawing of 6 lines, arcs and shapes, not listed
  text "K2_DRIVE" at 2146.05,3700.79 h59.06 r270
  text "SCK" at 1562.78,3688.98 h59.06 r270
  text "SDO" at 1662.78,3688.98 h59.06 r270
  text "SDI" at 1762.78,3688.98 h59.06 r270
  text "CS_U1" at 1867.7,3688.98 h59.06 r270
  text "CS_U2" at 1967.7,3688.98 h59.06 r270
  text "K3_DRIVE" at 2067.7,3688.98 h59.06 r270
  text "K1_DRIVE" at 2267.7,3688.98 h59.06 r270
  text "GND" at 2362.78,3688.98 h59.06 r270
  text "+5V" at 2462.78,3688.98 h59.06 r270
  text "IMPORTANT: POWER 5V AFTER 24V" at 3090.55,3268.96 h60 r180
  text "PV+" at 1210.79,2037.56 h60
  text "PV+" at 185.12,1978.82 h180
  text "GND" at 1232.05,1314.11 h60
  text "GND" at 167.8,1250.47 h180
  text "POWER 24V FIRST" at 39.37,727.11 h60
  text "+24V" at 1210.79,648.82 h60
  text "IMPORTANT: PLUG IN +24V BEFORE +5V" at 1574.8,510.57 h60
  text "+24V" at 108.74,502.44 h180
  text "ARIA ZADEH 8/6/2026" at 1584.8,423.39 h60
  text "DIGITAL PV LOAD" at 1574.8,119.32 h60
Board Outline:
  lines w7.87: 0,3877.95 0,0 3405.51,0 ; 0,3877.95 0,3877.95 ; 0,3877.95 3405.51,3877.95 3405.51,0 ; 3405.51,0 3405.51,0

## Text inside footprints (layer, text, board x,y; h text height)
D4: Top Overlay "*" at 799.98,3454.17 h27.56 r180
"Header Side": Top Overlay "*" at 2612.15,3838.96 h60 r180
K1: Top Overlay "*" at 1706.52,1911.35 h60
K2: Top Overlay "*" at 1739.86,1223.25 h60
K3: Top Overlay "*" at 1724.9,2619.2 h60
Q1: Top Overlay "*" at 2816.51,1794.82 h40
Q2: Top Overlay "*" at 2807.46,1123.96 h40
Q3: Top Overlay "*" at 2807.46,2482.22 h40
U1: Top Overlay "*" at 588.48,3272.98 h40
U2: Top Overlay "*" at 590.39,2945.34 h40